# Altium PCB P100_G0-DevBoard.PcbDoc
Units mm, origin at the board's own origin, x right, y up, seen from the top; angles counter-clockwise.
Board outline 40.64 x 27.94 mm, 2 copper layers (Top Layer, Bottom Layer); 35 components, 31 nets, 112 pads, 37 vias.
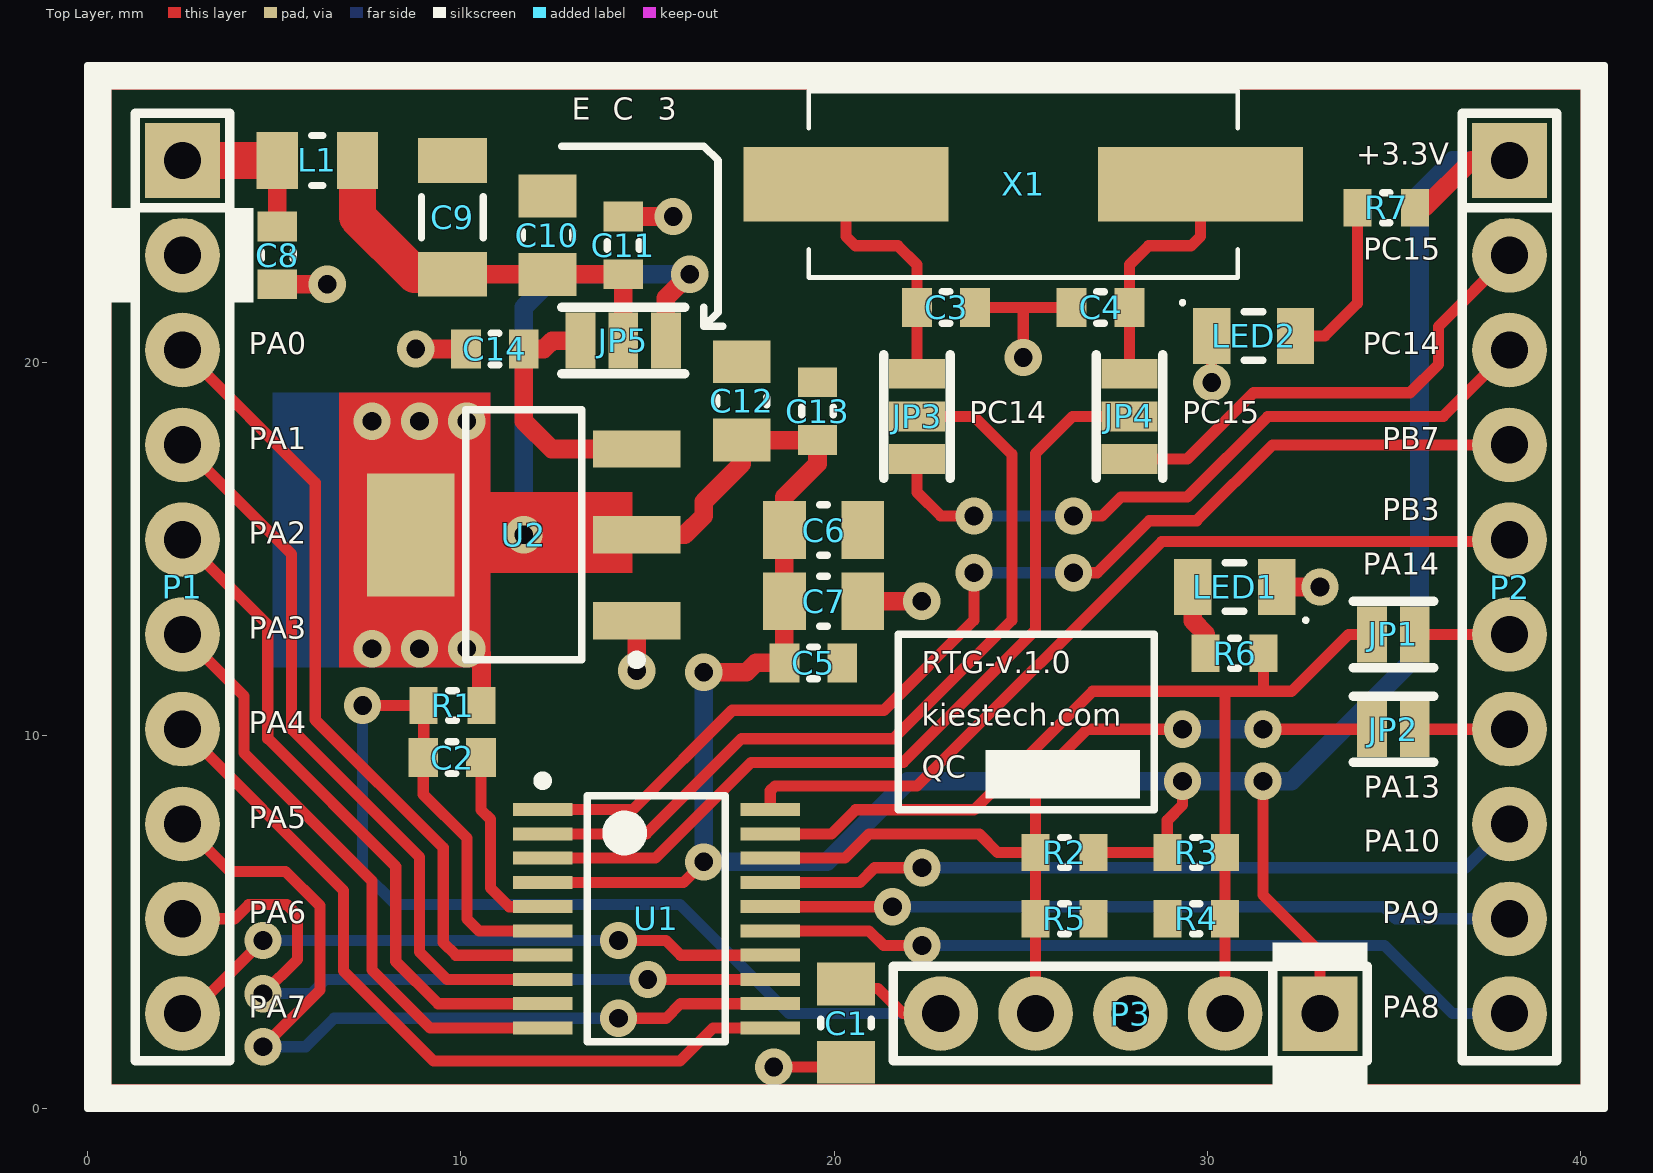
[diagram p0: Top Layer view]
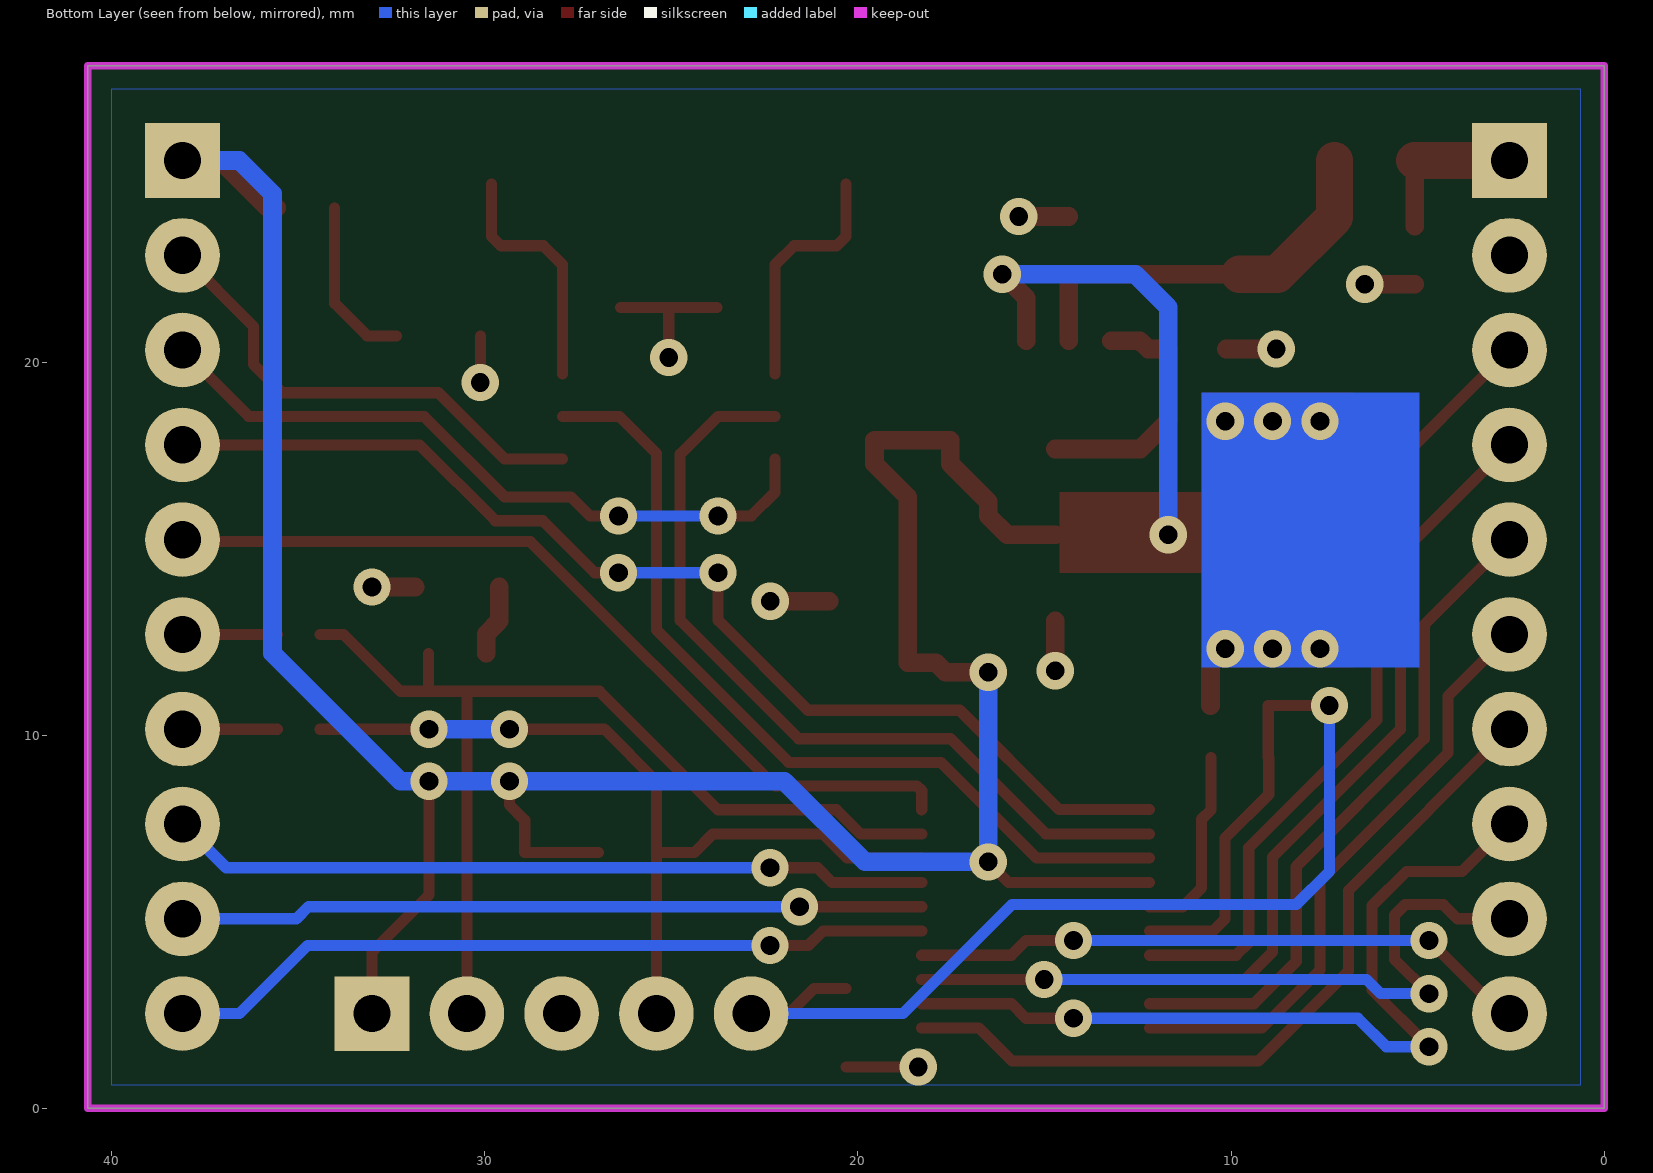
[diagram p1: Bottom Layer view, seen from below]

## Layer stack, top to bottom
Top Solder: solder mask 0.0102, Solder Resist, Dk 3.5
Top Layer: signal copper 0.0356
Dielectric 1: dielectric 0.32, FR-4, Dk 4.8
Bottom Layer: signal copper 0.0356
Bottom Solder: solder mask 0.0102, Solder Resist, Dk 3.5

## Board outline
0,0 0,27.94 40.64,27.94 40.64,0

## Design rules (kind name [scope] priority, off if disabled: settings)
Clearance [All] p1: gap=0.254 ignorepadtopadclearanceinfootprint=FALSE except(0: Arc-Hole Track-Hole SMDPad-Hole THPad-Hole Via-Hole Fill-Hole Poly-Hole Region-Hole Text-Hole)
PolygonConnect PolygonConnect_2 [All vs IsNamedPolygon('Top Layer-GND')] p1: thpad.connectstyle=Relief thpad.reliefconductorwidth=0.254 thpad.reliefentries=4 thpad.polygonreliefangle="90 Angle" thpad.airgapwidth=0.254 smdpad.connectstyle=Relief smdpad.reliefconductorwidth=0.254 smdpad.reliefentries=4 smdpad.polygonreliefangle="90 Angle" smdpad.airgapwidth=0.254 via.connectstyle=Direct via.reliefconductorwidth=0.254 via.reliefentries=4 via.polygonreliefangle="90 Angle" via.airgapwidth=0.254
PolygonConnect PolygonConnect_1 [All vs IsNamedPolygon('Top Layer-GND')] p2: thpad.connectstyle=Relief thpad.reliefconductorwidth=0.254 thpad.reliefentries=4 thpad.polygonreliefangle="90 Angle" thpad.airgapwidth=0.254 smdpad.connectstyle=Relief smdpad.reliefconductorwidth=0.254 smdpad.reliefentries=4 smdpad.polygonreliefangle="90 Angle" smdpad.airgapwidth=0.254 via.connectstyle=Direct via.reliefconductorwidth=0.254 via.reliefentries=4 via.polygonreliefangle="90 Angle" via.airgapwidth=0.254
PolygonConnect [All] p3: connectstyle=Relief reliefconductorwidth=0.254 reliefentries=4 polygonreliefangle="90 Angle" airgapwidth=0.254
RoutingVias [All] p1: holewidth=0.5 width=1 viastyle="Through Hole" minholewidth=0.5 minwidth=0.5 maxholewidth=7 maxwidth=7
SolderMaskExpansion [All] p1: expansion=0.102
Width [All] p1: maxlimit=7 minlimit=0.254 preferedwidth=0.254
30 further rules are at their usual default settings.

## Classes and differential pairs
component class P03_Design_Block_Diagram: P1 P2
component class Designator: C8 C9 C10 C11 C12 C13 C14 JP5 L1 LED2 R7 U2

## Components (designator, comment, footprint, x,y, rotation, side; value= is the part's Value field where it differs from the comment)
C1 "4.7uF 50V 0805 10%" CAPC-0805-M 20.32,2.286 r270 top
C2 "100nF 50V 0603 10%" CAPC-0603-M 9.766,9.398 r0 top
C3 "18pF 50V 0603 10%" CAPC-0603-M 23,21.463 r0 top
C4 "18pF 50V 0603 10%" CAPC-0603-M 27.14,21.463 r180 top
C5 "100nF 50V 0603 10%" CAPC-0603-M 19.444,11.938 r0 top
C6 "1uF 50V 0805 10%" CAPC-0805-M 19.719,15.494 r0 top
C7 "1uF 50V 0805 10%" CAPC-0805-M 19.719,13.589 r0 top
C8 "100nF 50V 0603 10%" CAPC-0603-M 5.08,22.86 r270 top
C9 "100nF 50V 1206 10%" CAPC-1206-M 9.77,23.875 r90 top
C10 "100nF 50V 0805 10%" CAPC-0805-M 12.319,23.4 r90 top
C11 "100nF 50V 0603 10%" CAPC-0603-M 14.351,23.125 r90 top
C12 "100nF 50V 0805 10%" CAPC-0805-M 17.526,18.957 r90 top
C13 "100nF 50V 0603 10%" CAPC-0603-M 19.558,18.682 r90 top
C14 "100nF 50V 0603 10%" CAPC-0603-M 10.909,20.349 r180 top
JP1 "Jumper_2" JMP_SMD_2 34.417,12.7 r0 top
JP2 "Jumper_2" JMP_SMD_2 34.417,10.16 r0 top
JP3 "Jumper_3" JMP_SMD_3 22.225,17.399 r90 top
JP4 "Jumper_3" JMP_SMD_3 27.915,17.399 r90 top
JP5 "Jumper_3" JMP_SMD_3 13.208,20.574 r0 top
L1 "FB" INDC-0805-M 6.155,25.4 r0 top
LED1 "LED_SMD_GRN_0805" LED-GRN-0805-M 30.734,13.97 r0 top
LED2 "LED_SMD_RED_0805" LED-RED-0805-M 31.242,20.701 r180 top
P1 "Header 10" HDR_1_10_M_180 2.54,25.4 r270 top
P2 "Header 10" HDR_1_10_M_180 38.1,25.4 r270 top
P3 "Prg" HDR_1_5_M_180 33.02,2.54 r180 top
R1 "1kR 0603 10%" RESC-0603-M 9.779,10.795 r0 top
R2 "10kR 0603 10%" RESC-0603-M 26.175,6.858 r0 top
R3 "10kR 0603 10%" RESC-0603-M 29.705,6.858 r180 top
R4 "10kR 0603 10%" RESC-0603-M 29.705,5.08 r180 top
R5 "10kR 0603 10%" RESC-0603-M 26.175,5.08 r0 top
R6 "1kR 0603 10%" RESC-0603-M 30.734,12.192 r0 top
R7 "1kR 0603 10%" RESC-0603-M 34.798,24.13 r0 top
U1 "STM32G030F6P6" TSOP-20-M 15.24,5.08 r0 top
U2 "LM1117_3.3V_SMD" SOT223-4M 11.684,15.367 r180 top
X1 "CRY_SMD_HC49" "HC49 US" 20.32,24.765 r0 top

## Footprints (in the part's own frame and the unit in brackets; to place one, negate y for a bottom-side part, rotate by r counter-clockwise, add the part's x,y. Pads: shape width x height; smd on the part's side, far side on the other; paste and mask are expansions set on the pad)
CAPC-0603-M [mm] "Chip Capacitor, 2-Leads, Body 1.60x0.80mm, IPC Low Density"
  rect 0.8x1.05 smd: 1(-0.775,0) 2(0.775,0)
  silkscreen extent -0.1,-0.43 0.1,0.43, body extent -0.85,-0.45 0.85,0.45, height 0.45
CAPC-0805-M [mm] "Chip Capacitor, 2-Leads, Body 2.00x1.30mm, IPC Low Density"
  rect 1.15x1.55 smd: 1(-1.05,0) 2(1.05,0)
  silkscreen extent -0.1,-0.67 0.1,0.67, body extent -1.05,-0.7 1.05,0.7, height 0.6
CAPC-1206-M [mm] "Chip Capacitor, 2-Leads, Body 3.05x1.60mm, IPC Low Density"
  rect 1.2x1.85 smd: 1(-1.525,0) 2(1.525,0)
  silkscreen extent -0.55,-0.82 0.55,0.82, body extent -1.55,-0.85 1.55,0.85, height 0.6
"HC49 US" [mm]
  rect 5.5x2 smd: 1(0,0) 2(9.5,0)
  silkscreen extent -1,-2.5 10.5,2.5, body extent -1.4,-2.25 10.9,2.25, height 4.2
HDR_1_5_M_180 [mm]
  rect 2x2 hole 1: 1(0,0)
  round 2 hole 1: 2(2.54,0) 3(5.08,0) 4(7.62,0) 5(10.16,0)
  silkscreen extent -1.27,-1.27 11.43,1.27, body extent -1.27,-1.27 11.43,1.27, height 5.94
HDR_1_10_M_180 [mm]
  rect 2x2 hole 1: 1(0,0)
  round 2 hole 1: 2(2.54,0) 3(5.08,0) 4(7.62,0) 5(10.16,0) 6(12.7,0) 7(15.24,0) 8(17.78,0) 9(20.32,0) 10(22.86,0)
  silkscreen extent -1.27,-1.27 24.13,1.27, body extent -1.27,-1.27 24.13,1.27, height 5.94
INDC-0805-M [mm] "Chip Inductor, 2-Leads, Body 2.00x1.30mm, IPC Low Density"
  rect 1.11x1.54 smd: 1(-1.075,0) 2(1.075,0)
  silkscreen extent -0.15,-0.67 0.15,0.67, body extent -1.05,-0.7 1.05,0.7, height 0.6
JMP_SMD_2 [mm]
  rect 0.8x1.5 smd: 1(0,0) 2(1.143,0)
  silkscreen extent -0.51,-0.89 1.65,0.89
JMP_SMD_3 [mm]
  rect 0.8x1.5 smd: 1(0,0) 2(1.143,0) 3(2.286,0)
  silkscreen extent -0.51,-0.89 2.79,0.89
LED-GRN-0805-M [mm] "Chip Diode, 2-Leads, Body 2.00x1.25mm, IPC Low Density"
  rect 1x1.5 smd: 1(-1.125,0) 2(1.125,0)
  silkscreen extent -0.25,-0.94 1.95,0.65, body extent -1,-0.62 1,0.62, height 0.8
LED-RED-0805-M [mm] "Chip Diode, 2-Leads, Body 2.00x1.25mm, IPC Low Density"
  rect 1x1.5 smd: 1(-1.125,0) 2(1.125,0)
  silkscreen extent -0.25,-0.94 1.95,0.65, body extent -1,-0.62 1,0.63, height 1.1
RESC-0603-M [mm] "Chip Resistor, 2-Leads, Body 1.60x0.80mm, IPC Low Density"
  rect 0.75x1 smd: 1(-0.775,0) 2(0.775,0)
  silkscreen extent -0.1,-0.4 0.1,0.4, body extent -0.85,-0.45 0.85,0.45, height 0.45
SOT223-4M [mm] "SOT223, 4-Leads, Body 6,50x7,00mm (avg), Pitch 2,30mm, IPC Low Density"
  rect 2.35x1 smd: 1(-3.025,2.3) 2(-3.025,0) 3(-3.025,-2.3)
  rect 2.35x3.3 smd: 4(3.025,0)
  silkscreen extent -3.15,-3.35 1.55,3.47, body extent -3.5,-3.35 3.5,3.35, height 1.8
TSOP-20-M [mm] "TSOP, 20-Leads, Body 6.50x4.40mm, Pitch 0.65mm, IPC Low Density"
  rect 1.6x0.35 smd: 1(-3.05,2.925) 2(-3.05,2.275) 3(-3.05,1.625) 4(-3.05,0.975) 5(-3.05,0.325) 6(-3.05,-0.325) 7(-3.05,-0.975) 8(-3.05,-1.625) 9(-3.05,-2.275) 10(-3.05,-2.925) 11(3.05,-2.925) 12(3.05,-2.275) 13(3.05,-1.625) 14(3.05,-0.975) 15(3.05,-0.325) 16(3.05,0.325) 17(3.05,0.975) 18(3.05,1.625) 19(3.05,2.275) 20(3.05,2.925)
  silkscreen extent -3.17,-3.3 1.85,3.82, body extent -3.2,-3.3 3.2,3.3, height 1.2

## Part data
C1 C6 C7 C10 C12: library part CAP_SMD_0805
C2 C3 C4 C5 C8 C11 C13 C14: library part CAP_SMD_0603
C9: library part CAP_SMD_1206
L1: library part IND_SMD_0805
P1 P2: "Header, 10-Pin", LatestRevisionDate=17-Jul-2002, LatestRevisionNote="Re-released for DXP Platform.", Publisher="Altium Limited"
P3: library part "Header 5", "Header, 5-Pin", LatestRevisionDate=17-Jul-2002, LatestRevisionNote="Re-released for DXP Platform.", Publisher="Altium Limited"
R1 R2 R3 R4 R5 R6 R7: library part RES_SMD_0603

## Via types
v1: diameter 1, hole 0.5, Top Layer to Bottom Layer, tented both sides, 37 vias

## Nets (pads, with @x,y where several pads share a name; then routed paths per layer and width w, separated by ;. In a path a pad name is that pad's centre, name@x,y a point inside that pad or via, vN(x,y) a via of type N, cw(c..) or ccw(c..) an arc to the next point about the centre after c; other vN are vias at no path point)
3.3V: C5.1 C6.1 C7.1 C12.1 C13.1 JP5.3 P2.1 P3.1 R1.2 R2.2 R3.2 R7.2 U1.4 U2.2 U2.4 | length 90.2
  Top Layer w0.3: U1.4 15.961,6.055 v1(16.51,6.604) ; R2.2 R3.2 28.93,7.721 29.337,8.128 v1(29.337,8.763) ; v1(31.496,8.763) 31.496,5.715 33.02,4.191 P3.1
  Top Layer w0.5: v1@10.16,12.573 10.554,12.179 R1.2 ; U2.2 16.002,15.367 16.51,15.875 16.51,16.256 17.526,17.272 C12.1 C13.1 19.558,17.272 18.669,16.383 C6.1 C7.1 C5.1 17.907,11.938 17.653,11.684 v1(16.51,11.684) ; JP5.3 15.494,21.717 v1(16.129,22.352) ; R7.2 35.814,24.13 37.084,25.4 P2.1
  Bottom Layer w0.5: v1(11.684,15.367) 11.684,21.463 12.573,22.352 v1(16.129,22.352) ; v1(16.51,11.684) v1(16.51,6.604) 19.812,6.604 21.971,8.763 v1(29.337,8.763) v1(31.496,8.763) 32.258,8.763 35.687,12.192 35.687,24.511 36.576,25.4 P2.1
  other v1: 7.62,12.319 8.89,12.319 10.16,12.319 7.62,18.415 8.89,18.415 10.16,18.415
CRY1: C3.1 JP3.3 X1.1 | length 6.5
  Top Layer w0.3: X1.1 20.32,23.368 20.574,23.114 21.717,23.114 22.225,22.606 C3.1 JP3.3
CRY2: C4.1 JP4.3 X1.2 | length 6.5
  Top Layer w0.3: JP4.3 C4.1 27.915,22.606 28.423,23.114 29.566,23.114 29.82,23.368 X1.2
GND: C1.2 C2.2 C3.2 C4.2 C5.2 C6.2 C7.2 C8.2 C9.2 C10.2 C11.2 C12.2 C13.2 C14.2 LED1.2 LED2.2 P1.2 P3.3 R4.2 R5.2 U1.5 U2.1 | length 20.4
  Top Layer w0.3: C2.2 10.541,8.001 10.795,7.747 10.795,5.904 11.294,5.405 U1.5 ; v1(18.381,1.109) C1.2@20.32,1.109 ; C3.2 C4.2 ; v1(25.07,20.121) 25.07,21.463 ; v1(30.117,19.449) LED2.2
  Top Layer w0.5: C8.2 v1(6.422,22.085) ; v1(8.792,20.349) C14.2 ; C11.2 v1(15.693,23.9) ; v1(14.709,11.725) U2.1 ; C7.2 v1(22.352,13.589) ; LED1.2 v1(33.02,13.97)
NetC9_1: C9.1 C10.1 C11.1 JP5.2 L1.2 | length 11
  Top Layer w0.5: C9.1 C10.1 C11.1 JP5.2
  Top Layer w1: L1.2 7.23,23.885 8.765,22.35 C9.1
NetC14_1: C14.1 JP5.1 U2.3 | length 6.9
  Top Layer w0.5: JP5.1 12.446,20.574 12.221,20.349 C14.1 11.684,18.415 12.432,17.667 U2.3
NetJP1_2: JP1.2 P2.6 | length 2.5
  Top Layer w0.3: JP1.2 P2.6
NetJP2_2: JP2.2 P2.7 | length 2.5
  Top Layer w0.3: JP2.2 P2.7
NetJP3_1: JP3.1 P2.3 | length 18.9
  Top Layer w0.3: JP3.1 22.225,16.51 22.86,15.875 v1(23.749,15.875) ; v1(26.416,15.875) 27.178,15.875 27.686,16.383 29.464,16.383 31.623,18.542 36.322,18.542 P2.3
  Bottom Layer w0.3: v1(23.749,15.875) v1(26.416,15.875)
NetJP4_1: JP4.1 P2.2 | length 13
  Top Layer w0.3: JP4.1 29.464,17.399 31.242,19.177 35.433,19.177 36.195,19.939 36.195,20.955 P2.2
NetLED1_1: LED1.1 R6.1 | length 1.9
  Top Layer w0.5: LED1.1 29.609,13.063 29.959,12.713 R6.1
NetLED2_1: LED2.1 R7.1 | length 4.6
  Top Layer w0.3: LED2.1 33.147,20.701 34.023,21.577 R7.1
NetP1_3: P1.3 U1.7 | length 21.6
  Top Layer w0.3: P1.3 6.096,16.764 6.096,10.414 9.525,6.985 9.525,4.445 9.865,4.105 U1.7
NetP1_4: P1.4 U1.8 | length 19.8
  Top Layer w0.3: P1.4 5.461,14.859 5.461,10.16 8.89,6.731 8.89,4.191 9.626,3.455 U1.8
NetP1_5: P1.5 U1.9 | length 18.1
  Top Layer w0.3: P1.5 4.826,12.954 4.826,9.906 8.255,6.477 8.255,3.937 9.387,2.805 U1.9
NetP1_6: P1.6 U1.10 | length 16.3
  Top Layer w0.3: P1.6 4.191,11.049 4.191,9.525 7.62,6.096 7.62,3.704 9.169,2.155 U1.10
NetP1_7: P1.7 U1.11 | length 21.1
  Top Layer w0.3: P1.7 6.858,5.842 6.858,3.683 9.271,1.27 15.875,1.27 16.76,2.155 U1.11
NetP1_8: P1.8 U1.12 | length 23.1
  Top Layer w0.3: P1.8 3.81,6.35 5.302,6.35 6.223,5.429 6.223,3.175 v1(4.699,1.651) ; v1(14.224,2.413) 15.494,2.413 15.886,2.805 U1.12
  Bottom Layer w0.3: v1(4.699,1.651) 5.842,1.651 6.604,2.413 v1(14.224,2.413)
NetP1_9: P1.9 U1.13 | length 19.6
  Top Layer w0.3: P1.9 3.937,5.08 4.318,5.461 5.334,5.461 5.62,5.175 5.62,3.995 v1(4.699,3.074) ; v1(15.012,3.455) U1.13
  Bottom Layer w0.3: v1(4.699,3.074) 5.995,3.074 6.376,3.455 v1(15.012,3.455)
NetP1_10: P1.10 U1.14 | length 16.7
  Top Layer w0.3: P1.10 2.742,2.54 v1(4.699,4.497) ; v1(14.224,4.497) 15.494,4.497 15.886,4.105 U1.14
  Bottom Layer w0.3: v1(4.699,4.497) v1(14.224,4.497)
NetP2_4: P2.4 U1.1 | length 30.7
  Top Layer w0.3: U1.1 14.609,8.005 17.272,10.668 21.336,10.668 23.749,13.081 v1(23.749,14.351) ; v1(26.416,14.351) 27.051,14.351 28.448,15.748 29.718,15.748 31.75,17.78 P2.4
  Bottom Layer w0.3: v1(23.749,14.351) v1(26.416,14.351)
NetP2_5: P2.5 U1.20 | length 23.1
  Top Layer w0.3: U1.20@18.294,8.001 U1.20 18.29,8.511 18.415,8.636 22.225,8.636 28.783,15.194 38.054,15.194 P2.5
NetP2_8: P2.8 U1.17 | length 20.5
  Top Layer w0.3: U1.17 20.694,6.055 21.086,6.447 v1(22.356,6.447)
  Bottom Layer w0.3: v1(22.356,6.447) 36.927,6.447 P2.8
NetP2_9: P2.9 U1.16 | length 19.9
  Top Layer w0.3: U1.16 v1(21.568,5.405)
  Bottom Layer w0.3: v1(21.568,5.405) 34.727,5.405 35.052,5.08 P2.9
NetP2_10: P2.10 U1.15 | length 20.7
  Top Layer w0.3: U1.15 20.94,4.755 21.332,4.363 v1(22.356,4.363)
  Bottom Layer w0.3: v1(22.356,4.363) 34.753,4.363 36.576,2.54 P2.10
NRST: C1.1 C2.1 P3.5 R1.1 U1.6 | length 34.3
  Top Layer w0.3: v1(7.366,10.795) R1.1 9.004,9.411 C2.1 8.991,8.408 10.16,7.239 10.16,5.08 10.485,4.755 U1.6 ; C1.1@20.32,3.209 21.175,3.209 21.844,2.54 P3.5
  Bottom Layer w0.3: v1(7.366,10.795) 7.366,6.35 8.255,5.461 15.875,5.461 18.796,2.54 P3.5
PC14: JP3.2 U1.2 | length 22.4
  Top Layer w0.3: U1.2 14.966,7.355 17.517,9.906 21.59,9.906 24.765,13.081 24.765,17.526 23.749,18.542 JP3.2
PC15: JP4.2 U1.3 | length 23.4
  Top Layer w0.3: U1.3 15.214,6.705 17.78,9.271 21.853,9.271 25.4,12.818 25.4,17.551 26.391,18.542 JP4.2
SWCLK: JP1.1 P3.2 R3.1 R4.1 R6.2 U1.19 | length 28
  Top Layer w0.3: U1.19@18.294,7.351 U1.19 19.928,7.355 20.574,8.001 23.749,8.001 26.924,11.176 30.48,11.176 ; P3.2 R4.1 R3.1 30.48,11.176 ; R6.2 31.509,11.189 31.496,11.176 ; JP1.1 33.782,12.7 32.258,11.176 31.496,11.176 ; 30.48,11.176 31.496,11.176
SWDIO: JP2.1 P3.4 R2.1 R5.1 U1.18 | length 23.4
  Top Layer w0.3: U1.18@18.294,6.701 U1.18 20.294,6.705 20.94,7.351 23.891,7.351 24.384,6.858 R2.1 ; P3.4 R5.1 R2.1 ; v1(29.337,10.16) 26.797,10.16 25.4,8.763 R2.1 ; v1(31.496,10.16) JP2.1
  Bottom Layer w0.5: v1(29.337,10.16) v1(31.496,10.16)
VEXT: C8.1 L1.1 P1.1 | length 4.3
  Top Layer w0.5: C8.1 L1.1
  Top Layer w1: P1.1 L1.1

## Polygon pours and split planes (outlines as drawn)
GND on Bottom Layer "Top Layer-GND" (solid, remove dead copper, shelved, pour order 0): 0.635,0.635 0.635,27.305 40.005,27.305 40.005,0.635
GND on Top Layer "Top Layer-GND" (solid, remove dead copper, shelved, pour order 2): 0.635,0.635 0.635,27.305 40.005,27.305 40.005,0.635

## Keep-outs
Keep-Out Layer:
  the board outline again, w0.2

## Other copper
Top Layer:
  rectangle net 3.3V: 9.398,14.351 14.605,16.51
  rectangle net 3.3V: 6.731,11.811 10.795,19.177
  pour cut-out: 17.145,27.94 17.145,21.59 33.02,21.59 33.02,27.94
Bottom Layer:
  rectangle net 3.3V: 4.953,11.811 10.795,19.177

## Silkscreen, mask and mechanical layers (free items; w line width, h text height)
Top Overlay:
  rectangle: 24.054,8.306 28.202,9.601
  rectangle: 0,0 0.635,27.94
  region: 40.64,27.94 40.005,27.94 40.005,0 40.64,0
  rectangle: 0,27.305 40.64,27.94
  rectangle: 0,0 40.64,0.635
  rectangle: 0.635,21.59 1.27,24.13
  region: 4.445,24.13 3.81,24.13 3.81,21.59 4.445,21.59
  region: 34.29,0.635 34.29,1.27 31.75,1.27 31.75,0.635
  region: 31.75,4.445 31.75,3.81 34.29,3.81 34.29,4.445
  lines w0.203: 12.7,25.781 16.51,25.781 16.891,25.4 16.891,21.336 16.51,20.955 ; 16.51,21.463 16.51,20.955 ; 17.018,20.955 16.51,20.955 ; 0,0 0,27.94 40.64,27.94 40.64,0 0,0 ; 21.717,8.001 28.575,8.001 28.575,12.7 21.717,12.7 21.717,8.001
  text "E" at 12.965,26.289 h1
  text "C" at 14.073,26.289 h1
  text "3" at 15.281,26.293 h1
  text "+3.3V" at 33.998,25.084 h1
  text "PC15" at 34.179,22.544 h1
  text "PA0" at 4.318,20.004 h1
  text "PC14" at 34.172,20.004 h1
  text "PC14" at 23.622,18.161 h1
  text "PC15" at 29.337,18.161 h1
  text "PA1" at 4.318,17.464 h1
  text "PB7" at 34.689,17.464 h1
  text "PB3" at 34.688,15.559 h1
  text "PA2" at 4.318,14.924 h1
  text "PA14" at 34.172,14.097 h1
  text "PA3" at 4.318,12.384 h1
  text "RTG-v.1.0" at 22.352,11.455 h1
  text "kiestech.com" at 22.352,10.058 h1
  text "PA4" at 4.318,9.844 h1
  text "QC" at 22.352,8.661 h1
  text "PA13" at 34.191,8.128 h1
  text "PA5" at 4.318,7.304 h1
  text "PA10" at 34.196,6.669 h1
  text "PA6" at 4.318,4.764 h1
  text "PA9" at 34.691,4.764 h1
  text "PA7" at 4.318,2.224 h1
  text "PA8" at 34.689,2.224 h1
Top Solder:
  rectangle: 6.731,11.811 10.795,19.177